# EAGLE board CT_schematic (EAGLE 7.6.0)

Size 100 x 80 mm. Coordinates in mm from the lower left corner, seen from the top.
Outline: 0,0 100,0 100,80 0,80 0,0
Copper layers (1*16): Top 0.035mm / dielectric 1.5mm / Bottom 0.035mm
Design rules "default": minimum track width 10mil, minimum drill 24mil, track to track 8mil, track to pad 8mil, pad to pad 8mil, via to via 8mil, smd to smd 8mil, copper to edge 40mil, drill to drill 8mil, minimum pad ring 10mil, minimum via ring 8mil, stop-mask expansion 4mil, vias tented up to drill 0mil, thermal gap 10mil

## Footprints (pad centres in the part's own frame; a part is rotated, then mirrored left to right if it is on the bottom)
C0603 = smd 0.8 x 0.8: 1 -0.762,0; 2 0.762,0
C0402 = smd 0.5 x 0.5: 1 -0.508,0; 2 0.508,0
C0805 = smd 1.2 x 1.3: 1 -1.016,0; 2 1.016,0
C1210 = smd 1.2 x 2.5: 1 -1.524,0; 2 1.524,0
2220 = smd 1.85 x 5.5: 1 -2.55,0; 2 2.55,0
EXV-9H = smd 3.505 x 1.676: 1 -2.857,0; 2 2.857,0
L0603 = smd 0.8 x 0.8: 1 -0.762,0; 2 0.762,0
L1210 = smd 1.2 x 2.5: 1 -1.524,0; 2 1.524,0
DR1040 = smd 1.6 x 3.2: 1 -4.458,0; 2 4.458,0
PJ-037B_PACKAGE = drill 3.7 square: 1 12,0 | drill 3.2 square: 2 6,0
R0603 = smd 0.8 x 0.8: 1 -0.762,0; 2 0.762,0
LQFP100 = smd 0.3 x 1.2: 1 -6,-7.75; 2 -5.5,-7.75; 3 -5,-7.75; 4 -4.5,-7.75; 5 -4,-7.75; 6 -3.5,-7.75; 7 -3,-7.75; 8 -2.5,-7.75; 9 -2,-7.75; 10 -1.5,-7.75; 11 -1,-7.75; 12 -0.5,-7.75; 13 0,-7.75; 14 0.5,-7.75; 15 1,-7.75; 16 1.5,-7.75; 17 2,-7.75; 18 2.5,-7.75; 19 3,-7.75; 20 3.5,-7.75; 21 4,-7.75; 22 4.5,-7.75; 23 5,-7.75; 24 5.5,-7.75; 25 6,-7.75; 51 6,7.75; 52 5.5,7.75; 53 5,7.75; 54 4.5,7.75; 55 4,7.75; 56 3.5,7.75; 57 3,7.75; 58 2.5,7.75; 59 2,7.75; 60 1.5,7.75; 61 1,7.75; 62 0.5,7.75; 63 0,7.75; 64 -0.5,7.75; 65 -1,7.75; 66 -1.5,7.75; 67 -2,7.75; 68 -2.5,7.75; 69 -3,7.75; 70 -3.5,7.75; 71 -4,7.75; 72 -4.5,7.75; 73 -5,7.75; 74 -5.5,7.75; 75 -6,7.75 | smd 1.2 x 0.3: 26 7.75,-6; 27 7.75,-5.5; 28 7.75,-5; 29 7.75,-4.5; 30 7.75,-4; 31 7.75,-3.5; 32 7.75,-3; 33 7.75,-2.5; 34 7.75,-2; 35 7.75,-1.5; 36 7.75,-1; 37 7.75,-0.5; 38 7.75,0; 39 7.75,0.5; 40 7.75,1; 41 7.75,1.5; 42 7.75,2; 43 7.75,2.5; 44 7.75,3; 45 7.75,3.5; 46 7.75,4; 47 7.75,4.5; 48 7.75,5; 49 7.75,5.5; 50 7.75,6; 76 -7.75,6; 77 -7.75,5.5; 78 -7.75,5; 79 -7.75,4.5; 80 -7.75,4; 81 -7.75,3.5; 82 -7.75,3; 83 -7.75,2.5; 84 -7.75,2; 85 -7.75,1.5; 86 -7.75,1; 87 -7.75,0.5; 88 -7.75,0; 89 -7.75,-0.5; 90 -7.75,-1; 91 -7.75,-1.5; 92 -7.75,-2; 93 -7.75,-2.5; 94 -7.75,-3; 95 -7.75,-3.5; 96 -7.75,-4; 97 -7.75,-4.5; 98 -7.75,-5; 99 -7.75,-5.5; 100 -7.75,-6
SOT-23-8 = smd 0.4 x 1.2: 1 -0.975,-1.3; 2 -0.325,-1.3; 3 0.325,-1.3; 4 0.975,-1.3; 5 0.975,1.3; 6 0.325,1.3; 7 -0.325,1.3; 8 -0.975,1.3
182-009-MALE = drill 1.194 pad 1.524 octagon: 1 -5.537,10.923; 2 -2.769,10.923; 3 0,10.923; 4 2.769,10.923; 5 5.537,10.923; 6 -4.153,8.08; 7 -1.384,8.08; 8 1.384,8.08; 9 4.153,8.08 | hole 3.048: -12.446,9.501; 12.446,9.501
SSOP-20 = smd 1.651 x 0.432: 1 -3.48,2.925; 2 -3.48,2.275; 3 -3.48,1.625; 4 -3.48,0.975; 5 -3.48,0.325; 6 -3.48,-0.325; 7 -3.48,-0.975; 8 -3.48,-1.625; 9 -3.48,-2.275; 10 -3.48,-2.925; 11 3.48,-2.925; 12 3.48,-2.275; 13 3.48,-1.625; 14 3.48,-0.975; 15 3.48,-0.325; 16 3.48,0.325; 17 3.48,0.975; 18 3.48,1.625; 19 3.48,2.275; 20 3.48,2.925
QFN-32 = smd 0.6 x 0.3: 1 -2.3,1.75; 2 -2.3,1.25; 3 -2.3,0.75; 4 -2.3,0.25; 5 -2.3,-0.25; 6 -2.3,-0.75; 7 -2.3,-1.25; 8 -2.3,-1.75; 17 2.3,-1.75; 18 2.3,-1.25; 19 2.3,-0.75; 20 2.3,-0.25; 21 2.3,0.25; 22 2.3,0.75; 23 2.3,1.25; 24 2.3,1.75 | smd 0.3 x 0.6: 9 -1.75,-2.3; 10 -1.25,-2.3; 11 -0.75,-2.3; 12 -0.25,-2.3; 13 0.25,-2.3; 14 0.75,-2.3; 15 1.25,-2.3; 16 1.75,-2.3; 25 1.75,2.3; 26 1.25,2.3; 27 0.75,2.3; 28 0.25,2.3; 29 -0.25,2.3; 30 -0.75,2.3; 31 -1.25,2.3; 32 -1.75,2.3 | smd 3.2 x 3.2: EXP 0,0
SJ-43515TS-SMT-TR = smd 2.2 x 3: 1 0.6,-7.4; 4 3.4,-7.4 | smd 3 x 3: 2 12.8,-7.4; 5 17,-3 | smd 2 x 3: 3 5.3,0; 6 2.5,0 | drill 1.8: P$7 4.5,-3.69; P$8 11.54,-3.69
WM-64PC = drill 0.6 pad 1: 1 -1,0.95; 2 -1,-0.95
ABS07-32.768KHZ-7-T = smd 1.1 x 2.4: 1 -2.5,0; 2 0,0
ASFL1 = smd 1.7 x 1.5: 1 -1.27,-1.1; 2 1.27,-1.1; 3 1.27,1.1; 4 -1.27,1.1
WSON-8 = smd 0.3 x 0.6: 1 -0.75,0; 2 0.05,0; 3 0.85,0; 4 1.65,0; 5 1.65,3.8; 6 0.85,3.8; 7 0.05,3.8; 8 -0.75,3.8 | smd 3 x 2.6: PAD 0.45,1.9
QFN-16_EP = smd 0.805 x 0.3: 1 -1.452,0.75; 2 -1.452,0.25; 3 -1.452,-0.25; 4 -1.452,-0.75; 9 1.452,-0.75; 10 1.452,-0.25; 11 1.452,0.25; 12 1.452,0.75 | smd 0.3 x 0.805: 5 -0.75,-1.452; 6 -0.25,-1.452; 7 0.25,-1.452; 8 0.75,-1.452; 13 0.75,1.452; 14 0.25,1.452; 15 -0.25,1.452; 16 -0.75,1.452 | smd 1.55 x 1.55: 17 0,0
SON-6 = smd 0.55 x 0.3: 1 -0.355,0.5 | smd 0.52 x 0.3: 2 -0.37,0; 3 -0.37,-0.5; 4 0.37,-0.5; 5 0.37,0; 6 0.37,0.5
SW_4-1437565-2 = smd 1.4 x 2.1: 1 -2.23,4.55; 2 -2.23,-4.55; 3 2.23,4.55; 4 2.23,-4.55
LGM67K-G1J2-24-Z = smd 0.8 x 1.4: A -2,0; C 0,0
NC7SZ125M5X = smd 1.3 x 0.7: 1 -1.3,0.95; 2 -1.3,0; 3 -1.3,-0.95; 4 1.3,-0.95; 5 1.3,0.95

## Placement (x,y rotation side)
C1  1e-06  [C0603]  -53.34,83.82 0 top  (outside the outline)
C2  1e-07  [C0603]  -57.15,83.82 0 top  (outside the outline)
C3  1e-07  [C0603]  -60.96,83.82 0 top  (outside the outline)
C4  1e-07  [C0603]  -64.77,83.82 0 top  (outside the outline)
C5  1e-07  [C0603]  -68.58,83.82 0 top  (outside the outline)
C6  1e-07  [C0603]  -72.39,83.82 0 top  (outside the outline)
C7  1e-07  [C0603]  -76.2,83.82 0 top  (outside the outline)
C8  4.7e-06  [C0603]  -49.53,83.82 0 top  (outside the outline)
C9  1e-08  [C0603]  -80.01,83.82 0 top  (outside the outline)
C10  1e-06  [C0603]  -83.82,83.82 0 top  (outside the outline)
C11  1e-11  [C0402]  -15.24,93.98 0 top  (outside the outline)
C12  1e-11  [C0402]  -19.05,93.98 0 top  (outside the outline)
C13  1e-07  [C0402]  -22.86,93.98 0 top  (outside the outline)
C14  1e-06  [C0603]  -87.63,83.82 0 top  (outside the outline)
C15  1e-06  [C0603]  -91.44,83.82 0 top  (outside the outline)
C16  1e-06  [C0603]  -15.24,88.9 0 top  (outside the outline)
C17  4.7e-06  [C0805]  -52.07,77.47 0 top  (outside the outline)
C18  1e-06  [C0603]  -19.05,88.9 0 top  (outside the outline)
C19  1e-06  [C0603]  -22.86,88.9 0 top  (outside the outline)
C20  1e-06  [C0603]  -26.67,88.9 0 top  (outside the outline)
C21  1e-06  [C0603]  -30.48,88.9 0 top  (outside the outline)
C22  1e-06  [C0603]  -34.29,88.9 0 top  (outside the outline)
C23  1e-06  [C0603]  -38.1,88.9 0 top  (outside the outline)
C24  1e-06  [C0603]  -41.91,88.9 0 top  (outside the outline)
C25  1e-07  [C0402]  -26.67,93.98 0 top  (outside the outline)
C26  1e-07  [C0402]  -30.48,93.98 0 top  (outside the outline)
C27  1e-07  [C0402]  -34.29,93.98 0 top  (outside the outline)
C28  1e-07  [C0402]  -38.1,93.98 0 top  (outside the outline)
C29  1e-06  [C0603]  -45.72,88.9 0 top  (outside the outline)
C30  1e-08  [C0402]  -41.91,93.98 0 top  (outside the outline)
C31  1e-08  [C0402]  -45.72,93.98 0 top  (outside the outline)
C32  1e-08  [C0402]  -49.53,93.98 0 top  (outside the outline)
C33  1e-05  [C1210]  -29.21,77.47 0 top  (outside the outline)
C34  1e-05  [C0805]  -57.15,77.47 0 top  (outside the outline)
C35  1e-05  [C0805]  -62.23,77.47 0 top  (outside the outline)
C36  1e-06  [C0603]  -49.53,88.9 0 top  (outside the outline)
C37  1e-07  [C0402]  -53.34,93.98 0 top  (outside the outline)
C38  6.8e-05  [2220]  -53.34,59.69 0 top  (outside the outline)
C39  1e-07  [C0402]  -57.15,93.98 0 top  (outside the outline)
C40  0.0001  [EXV-9H]  -53.34,68.58 0 top  (outside the outline)
C41  0.0001  [EXV-9H]  -64.77,68.58 0 top  (outside the outline)
C42  1e-08  [C0402]  -60.96,93.98 0 top  (outside the outline)
F1  240.0  [L0603]  -53.34,88.9 0 top  (outside the outline)
I1  1.5e-05  [L1210]  -35.56,77.47 0 top  (outside the outline)
I2  5.2e-06  [DR1040]  -82.55,45.72 0 top  (outside the outline)
J1  PJ-037B  [PJ-037B_PACKAGE]  -55.88,46.99 0 top  (outside the outline)
R2  1000.0  [R0603]  -57.15,88.9 0 top  (outside the outline)
R4  4700.0  [R0603]  -60.96,88.9 0 top  (outside the outline)
R5  10000.0  [R0603]  -25.4,83.82 0 top  (outside the outline)
R6  120.0  [R0603]  -64.77,88.9 0 top  (outside the outline)
R7  100000.0  [R0603]  -67.31,76.2 0 top  (outside the outline)
R8  100000.0  [R0603]  -72.39,76.2 0 top  (outside the outline)
R9  100000.0  [R0603]  -77.47,76.2 0 top  (outside the outline)
R10  1270.0  [R0603]  -68.58,88.9 0 top  (outside the outline)
R11  1270.0  [R0603]  -72.39,88.9 0 top  (outside the outline)
R12  100000.0  [R0603]  -82.55,76.2 0 top  (outside the outline)
R13  200.0  [R0603]  -76.2,88.9 0 top  (outside the outline)
R14  1000.0  [R0603]  -80.01,88.9 0 top  (outside the outline)
R15  20000.0  [R0603]  -30.48,83.82 0 top  (outside the outline)
R16  91000.0  [R0603]  -35.56,83.82 0 top  (outside the outline)
R17  300000.0  [R0603]  -87.63,76.2 0 top  (outside the outline)
R18  10000.0  [R0603]  -40.64,83.82 0 top  (outside the outline)
R19  10000.0  [R0603]  -45.72,83.82 0 top  (outside the outline)
R20  9100.0  [R0603]  -83.82,88.9 0 top  (outside the outline)
R21  680000.0  [R0603]  -15.24,83.82 0 top  (outside the outline)
R22  120000.0  [R0603]  -20.32,83.82 0 top  (outside the outline)
U1  stm32f103vft7  [LQFP100]  -21.59,31.75 0 top  (outside the outline)
U2  MAX3051EKA+T  [SOT-23-8]  -40.64,76.2 0 top  (outside the outline)
U3  182-009-113R531  [182-009-MALE]  -36.83,6.35 0 top  (outside the outline)
U4  MAX3218EAP+T  [SSOP-20]  -44.45,58.42 0 top  (outside the outline)
U5  182-009-113R531  [182-009-MALE]  -76.2,6.35 0 top  (outside the outline)
U6  SGTL5000XNAA3  [QFN-32]  -34.29,59.69 0 top  (outside the outline)
U7  SJ-43515TS-SMT-TR  [SJ-43515TS-SMT-TR]  -57.15,31.75 0 top  (outside the outline)
U8  SJ-43515TS-SMT-TR  [SJ-43515TS-SMT-TR]  -85.09,31.75 0 top  (outside the outline)
U9  SJ-43515TS-SMT-TR  [SJ-43515TS-SMT-TR]  -39.37,49.53 0 top  (outside the outline)
U10  WM-64PCT  [WM-64PC]  -20.32,59.69 0 top  (outside the outline)
U11  ABS07-32.768KHZ-7-T  [ABS07-32.768KHZ-7-T]  -86.36,68.58 0 top  (outside the outline)
U12  ASFL-24.57MHZ-NCS  [ASFL1]  -27.94,69.85 0 top  (outside the outline)
U13  ASFL1-25MHZ-NCS  [ASFL1]  -44.45,69.85 0 top  (outside the outline)
U14  LP3878SDX-ADJ/NOPB  [WSON-8]  -74.93,57.15 0 top  (outside the outline)
U15  LTC3601EUD#PBF  [QFN-16_EP]  -88.9,88.9 0 top  (outside the outline)
U16  TPS3895ADRYR  [SON-6]  -63.5,92.71 0 top  (outside the outline)
U17  4-1437565-2  [SW_4-1437565-2]  -72.39,46.99 0 top  (outside the outline)
U18  Q65110A2395  [LGM67K-G1J2-24-Z]  -17.78,77.47 0 top  (outside the outline)
U19  nc7sz125m5x  [NC7SZ125M5X]  -45.72,76.2 0 top  (outside the outline)

## Library data of the parts
C1-C42 F1 I1 I2 J1 R2 R4-R22 U1-U19 = circuit_tree

## Nets
CLK_CRYSTAL_U1_8: C11.1 U1.8 U11.1
CLK_CRYSTAL_U1_9: C12.1 U1.9 U11.2
CLK_U1_12: U1.12 U13.3
CLK_U6_21: U6.21 U12.3
GND: C1.2 C2.2 C3.2 C4.2 C5.2 C6.2 C7.2 C8.2 C9.2 C10.2 C11.2 C12.2 C13.2 C14.2 C15.2 C16.2 C25.2 C26.2 C27.2 C28.2 C29.2 C30.2 C31.2 C32.2 C33.2 C34.2 C35.2 C36.2 C38.1 C38.2 C39.2 C40.2 C41.2 C42.2 J1.2 R2.2 R5.2 R11.2 R14.2 R15.2 R17.2 R20.2 R22.2 U1.10 U1.19 U1.20 U1.27 U1.49 U1.74 U1.99 U2.2 U2.8 U3.5 U4.5 U4.17 U4.20 U5.5 U6.1 U6.3 U6.7 U6.EXP U8.1 U9.1 U10.2 U12.2 U13.2 U14.3 U14.PAD U15.1 U15.9 U15.17 U16.2 U18.C U19.1 U19.3
NET_U1_14: R4.1 U1.14 U19.4
NET_U1_22: C9.1 C10.1 F1.1 U1.21 U1.22
NET_U1_94: R5.1 U1.94
NET_U1_97: U18.A
NET_U1_98: U17.3 U17.4
NET_U2_6: R6.2 U2.6
NET_U3_2: R6.2 U2.6 U3.2
NET_U3_3: R6.1 U2.7 U3.3
NET_U4_1: I1.1 U4.1
NET_U4_2: R7.1 U4.2
NET_U4_3: R8.1 U4.3
NET_U4_4: R9.1 U4.4
NET_U4_15: C16.1 U4.15
NET_U4_16: C17.2 U4.16
NET_U4_18: C17.1 U4.18
NET_U4_19: C15.1 U4.19
NET_U5_2: U4.12 U5.2
NET_U5_3: U4.14 U5.3
NET_U5_7: U4.11 U5.7
NET_U5_8: U4.13 U5.8
NET_U6_10: C28.1 U6.10
NET_U6_29: R10.1 U6.29
NET_U6_31: R11.1 U6.31
NET_U7_1: U6.4 U7.1
NET_U7_2: U6.2 U7.2
NET_U7_5: U6.6 U7.5
NET_U8_2: C19.1 U8.2
NET_U8_5: C18.1 U8.5
NET_U8_11: C19.2
NET_U8_12: C18.2
NET_U9_2: C21.1 C22.1 U9.2
NET_U9_5: C20.1 U9.5
NET_U9_13: C21.2 C22.2
NET_U9_14: C20.2
NET_U10_1: C23.1 C24.1 C29.1 U6.16 U10.1
NET_U10_15: C23.2 C24.2
NET_U14_1: C32.1 U14.1
NET_U14_6: R13.2 R14.1 U14.6
NET_U14_8: R12.1 U14.8
NET_U15_3: C37.2 I2.1 U15.3 U15.4
NET_U15_6: C37.1 U15.6
NET_U15_7: C36.1 U15.7 U15.12
NET_U15_10: R17.1 U15.10
NET_U15_11: R15.1 R16.1 U15.11
NET_U15_14: U15.14
NET_U15_ATNET_3: I2.2 R16.2
NET_U16_1: R19.1 R20.1 U16.1
NET_U16_3: R21.2 R22.1 U16.3
NET_U16_4: R18.1 U16.4 U19.2
NET_U17_1: R2.1 U17.1 U17.2
PROC_CAN_RX: U1.70 U2.4
PROC_CAN_TX: U1.71 U2.1
PROC_I2S2_CK: U1.52 U6.24
PROC_I2S2_SD: U1.54 U6.26
PROC_I2S2_WS: U1.51 U6.23
PROC_UART4_RX: U4.9
PROC_UART4_TX: U4.7
VCC_S1_11V8: C33.1 C35.1 C40.1 C41.1 J1.1 R12.2 U14.4 U15.15 U15.16
VCC_TIER1_1V2: C25.1 C34.1 R13.1 U6.30 U14.5
VCC_TIER1_3V3: C1.1 C2.1 C3.1 C4.1 C5.1 C6.1 C7.1 C8.1 C13.1 C14.1 C26.1 C27.1 C30.1 C31.1 C38.2 C39.1 C42.1 F1.2 I1.2 I2.2 R4.2 R7.2 R8.2 R9.2 R10.2 R16.2 R18.2 R19.2 R21.1 U1.6 U1.11 U1.28 U1.50 U1.75 U1.100 U2.3 U4.6 U6.5 U6.20 U12.4 U13.4 U15.8 U16.6 U19.5

## Tracks (layer width: path | path; a pad name or v marks a point on that pad's centre or on a via)
CLK_CRYSTAL_U1_8  (2 unrouted)
CLK_CRYSTAL_U1_9  (2 unrouted)
CLK_U1_12  (1 unrouted)
CLK_U6_21  (1 unrouted)
GND  (74 unrouted)
NET_U1_14  (2 unrouted)
NET_U1_22  (4 unrouted)
NET_U1_94  (1 unrouted)
NET_U1_98  (1 unrouted)
NET_U2_6  (1 unrouted)
NET_U3_2  (2 unrouted)
NET_U3_3  (2 unrouted)
NET_U4_1  (1 unrouted)
NET_U4_2  (1 unrouted)
NET_U4_3  (1 unrouted)
NET_U4_4  (1 unrouted)
NET_U4_15  (1 unrouted)
NET_U4_16  (1 unrouted)
NET_U4_18  (1 unrouted)
NET_U4_19  (1 unrouted)
NET_U5_2  (1 unrouted)
NET_U5_3  (1 unrouted)
NET_U5_7  (1 unrouted)
NET_U5_8  (1 unrouted)
NET_U6_10  (1 unrouted)
NET_U6_29  (1 unrouted)
NET_U6_31  (1 unrouted)
NET_U7_1  (1 unrouted)
NET_U7_2  (1 unrouted)
NET_U7_5  (1 unrouted)
NET_U8_2  (1 unrouted)
NET_U8_5  (1 unrouted)
NET_U9_2  (2 unrouted)
NET_U9_5  (1 unrouted)
NET_U9_13  (1 unrouted)
NET_U10_1  (4 unrouted)
NET_U10_15  (1 unrouted)
NET_U14_1  (1 unrouted)
NET_U14_6  (2 unrouted)
NET_U14_8  (1 unrouted)
NET_U15_3  (3 unrouted)
NET_U15_6  (1 unrouted)
NET_U15_7  (2 unrouted)
NET_U15_10  (1 unrouted)
NET_U15_11  (2 unrouted)
NET_U15_ATNET_3  (1 unrouted)
NET_U16_1  (2 unrouted)
NET_U16_3  (2 unrouted)
NET_U16_4  (2 unrouted)
NET_U17_1  (2 unrouted)
PROC_CAN_RX  (1 unrouted)
PROC_CAN_TX  (1 unrouted)
PROC_I2S2_CK  (1 unrouted)
PROC_I2S2_SD  (1 unrouted)
PROC_I2S2_WS  (1 unrouted)
VCC_S1_11V8  (8 unrouted)
VCC_TIER1_1V2  (4 unrouted)
VCC_TIER1_3V3  (43 unrouted)